# Altium PCB MB1183_B.PcbDoc
Units mil, origin at the board's own origin, x right, y up, seen from the top; angles counter-clockwise.
Board outline 885.83 x 1574.8 mil, 2 copper layers (Top Layer, Bottom Layer), stack 61.855 mil thick; 23 components, 26 nets, 127 pads, 65 vias.
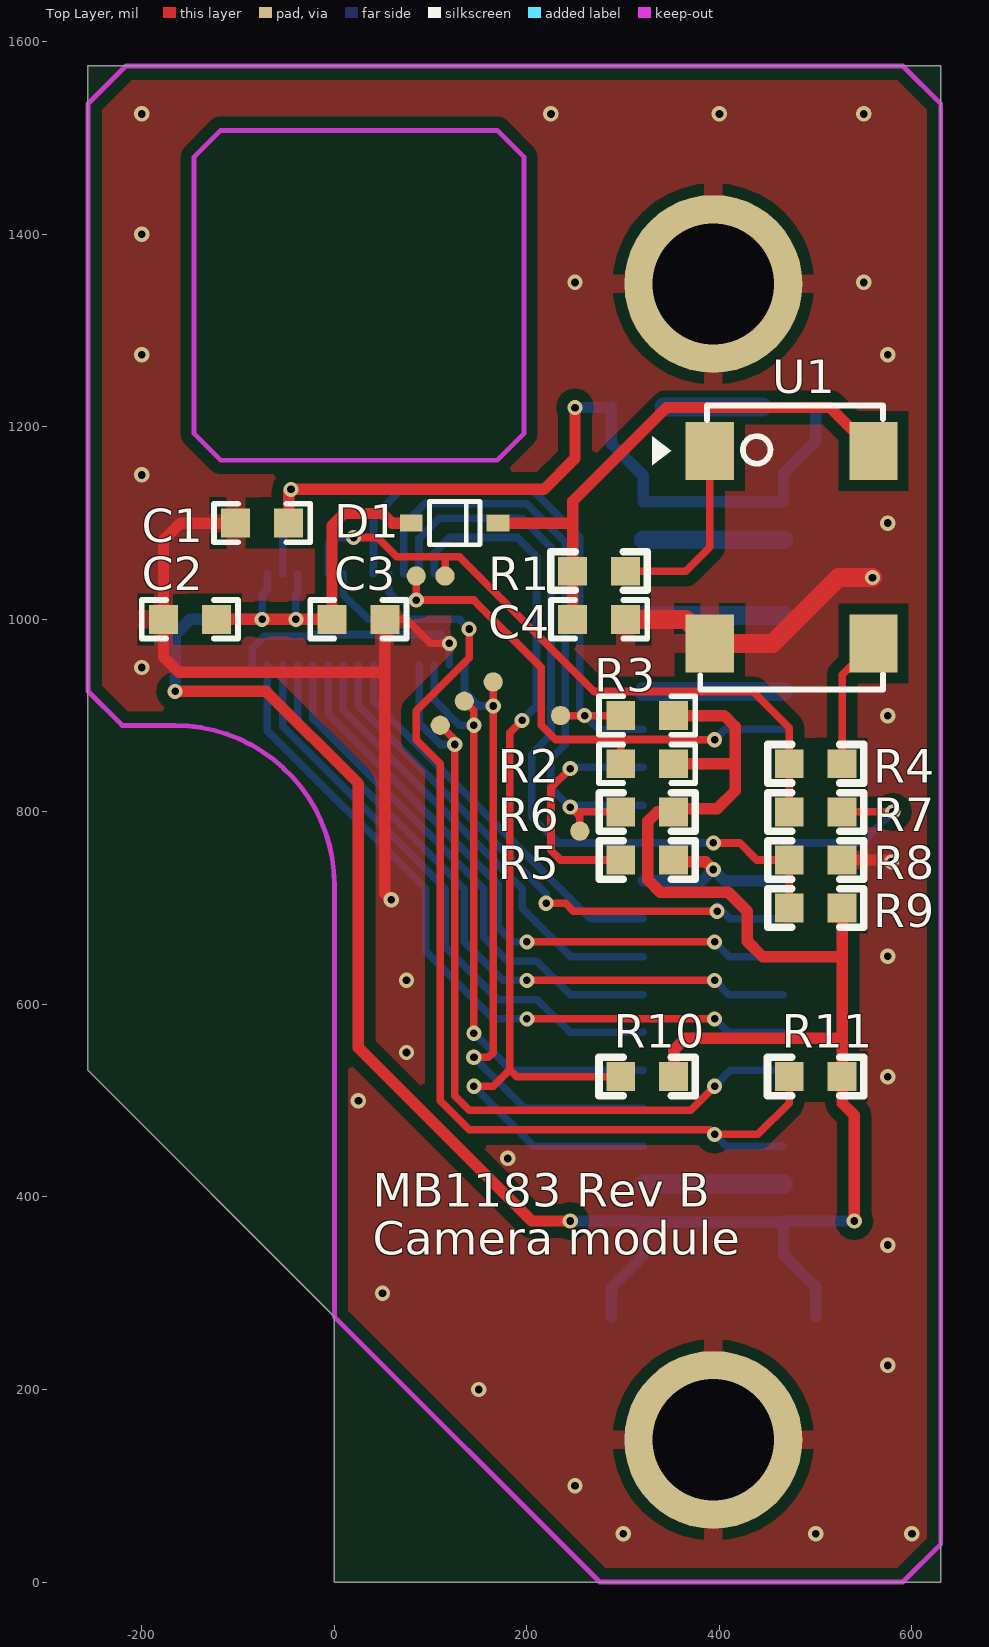
[diagram p0: Top Layer view]
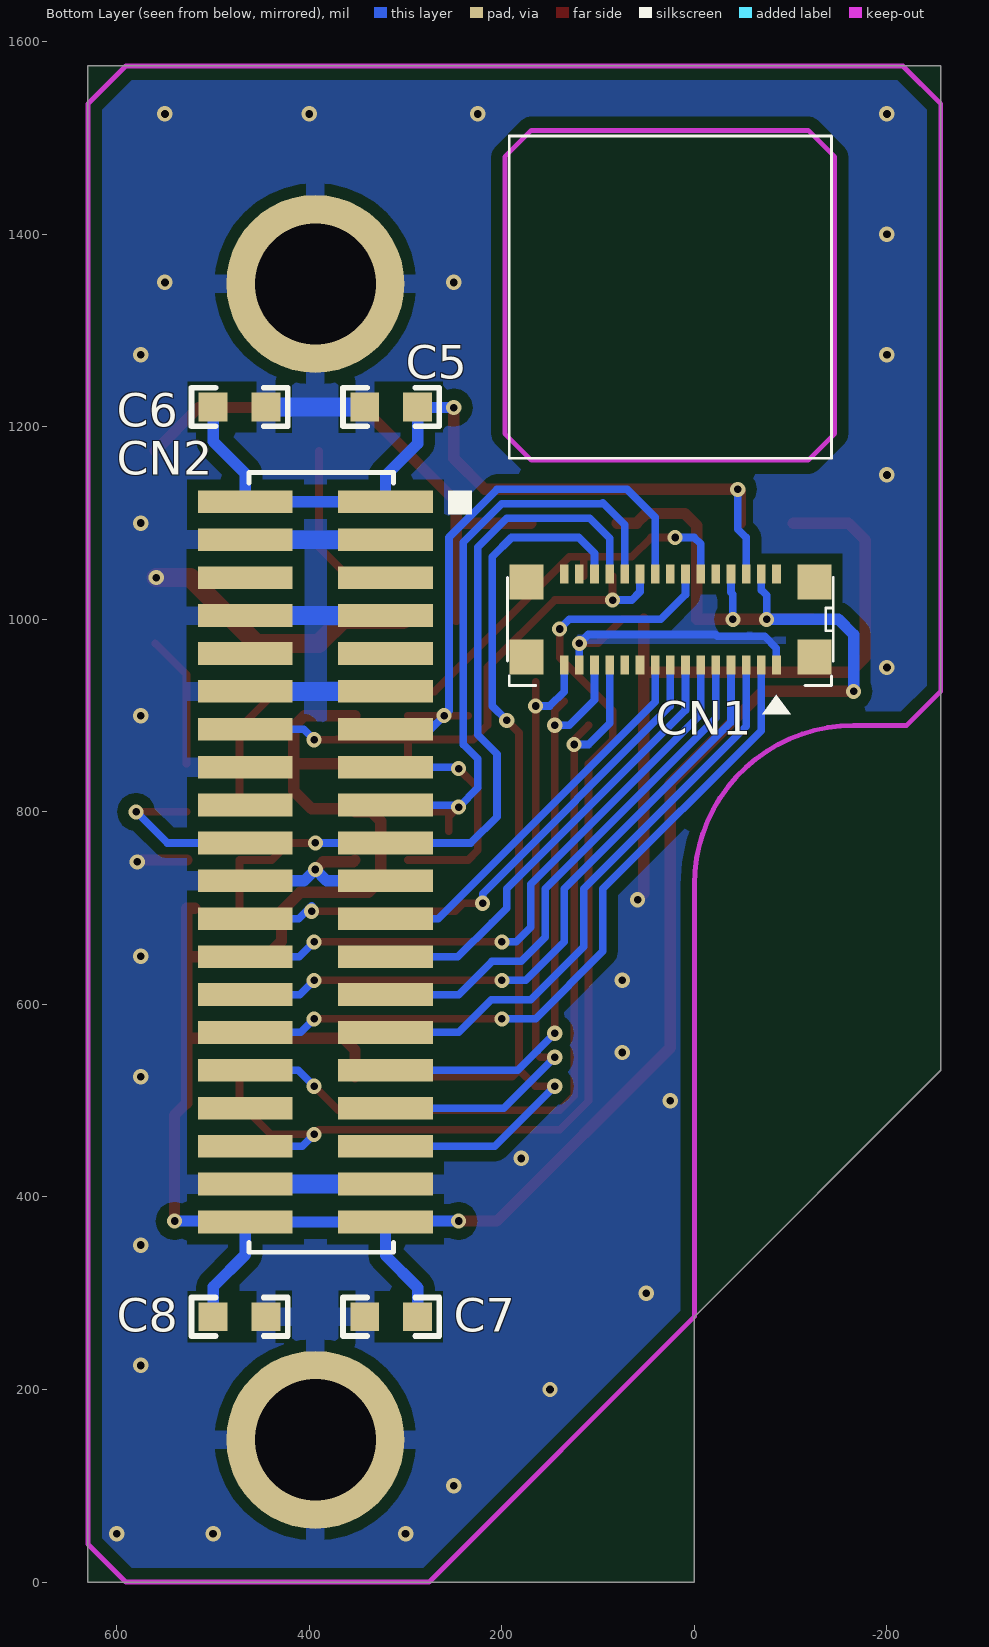
[diagram p1: Bottom Layer view, seen from below]

## Layer stack, top to bottom
Top Layer: signal copper 1.4
Dielectric: core 59.0551, FR-4, Dk 4.8
Bottom Layer: signal copper 1.4

## Board outline
0,0 629.92,0 629.92,1574.8 -255.91,1574.8 -255.91,531.5 0,275.59 0,0

## Design rules (kind name [scope] priority, off if disabled: settings)
Clearance Clearance_1 [(InPoly)] p1: gap=11.81
Clearance [All] p2: gap=5.91
FabricationTestPointUsage TestPointUsage [All] p1: valid=0 allowmultiple=FALSE
FabricationTestpoint Testpoint [(IsPad And (OnTopLayer Or OnBottomLayer))] p1: side=3 testpointundercomponent=TRUE minsize=40 maxsize=100 preferedsize=60 minholesize=0 maxholesize=40 preferedholesize=32 testpointgrid=1 allowsidetop=TRUE allowsidebottom=TRUE usegrid=TRUE gridtolerance=0.01
HoleSize [All] p1: absolutevalues=TRUE maxlimit=150 minlimit=1 maxpercent=80.000 minpercent=20.000
PlaneClearance [All] p1: clearance=19.68
PolygonConnect PolygonConnect_2 [(InComponent('CN1'))] p1: connectstyle=NoConnect reliefconductorwidth=10 reliefentries=2 polygonreliefangle="90 Angle"
PolygonConnect PolygonConnect_1 [IsVia] p2: connectstyle=Direct reliefconductorwidth=20 reliefentries=4 polygonreliefangle="90 Angle"
PolygonConnect [All] p3: connectstyle=Relief reliefconductorwidth=19.68 reliefentries=4 polygonreliefangle="90 Angle"
RoutingLayers [All] p1: top layer_v5=FALSE bottom layer_v5=FALSE
RoutingVias [All] p1: holewidth=11.81 width=23.62 viastyle="Through Hole" minholewidth=7.87 minwidth=15.75 maxholewidth=27.56 maxwidth=51.18
SilkscreenOverComponentPads [All] p1: minsilkscreentomaskgap=10
SolderMaskExpansion [All] p1: expansion=4
Width [All] p1: maxlimit=98.43 minlimit=5.91 preferedwidth=7.87 minimp=50.000000 maximp=50.000000 favimp=50.000000
22 further rules are at their usual default settings.

## Classes and differential pairs
net class PAR_D[0..7]: PAR_D0 PAR_D1 PAR_D2 PAR_D3 PAR_D4 PAR_D5 PAR_D6 PAR_D7

## Components (designator, comment, footprint, x,y, rotation, side; value= is the part's Value field where it differs from the comment)
C1 "100nF" 0603C -75,1100 r0 top (schematic designator C4)
C2 "100nF" 0603C -150,1000 r0 top (schematic designator C3)
C3 "100nF" 0603C 25,1000 r180 top (schematic designator C5)
C4 "100nF" 0603C 275,1000 r180 top (schematic designator C8)
C5 "100nF" 0603C 314.96,1220.47 r0 bottom (schematic designator C1)
C6 "100nF" 0603C 472.44,1220.47 r0 bottom (schematic designator C2)
C7 "100nF" 0603C 472.44,275.59 r0 bottom
C8 "100nF" 0603C 314.96,275.59 r180 bottom (schematic designator C6)
CN1 "AXE530124" AXE530124 25,1000 r0 bottom (schematic designator CN2)
CN2 "FTMH-120-03-L-DV-ES" FTMH-120-03-L-DV-ES 393.7,748.03 r270 bottom locked (schematic designator CN1)
D1 "BAT60JFILM" SOD-323 125,1100 r180 top
R1 "10K" 0603R 275,1050 r180 top (schematic designator R7)
R2 "[N/A]" 0603R 325,850 r0 top (schematic designator R8)
R3 "[N/A]" 0603R 325,900 r0 top (schematic designator R9)
R4 "0" 0603R 500,850 r0 top (schematic designator R6)
R5 "0" 0603R 325,750 r180 top (schematic designator R3)
R6 "10K" 0603R 325,800 r0 top (schematic designator R2)
R7 "[N/A]" 0603R 500,800 r0 top (schematic designator R5)
R8 "[N/A]" 0603R 500,750 r0 top (schematic designator R4)
R9 "22K" 0603R 500,700 r0 top (schematic designator R1)
R10 "[N/A]" 0603R 325,525 r0 top
R11 "[N/A]" 0603R 500,525 r0 top
U1 "SM7745HEW-24.0M" XTAL_5X7 475,1075 r270 top

## Footprints (in the part's own frame and the unit in brackets; to place one, negate y for a bottom-side part, rotate by r counter-clockwise, add the part's x,y. Pads: shape width x height; smd on the part's side, far side on the other; paste and mask are expansions set on the pad)
0603C [mil]
  rect 30x30 smd: 1(27.5,0) 2(-27.5,0)
  silkscreen extent -50,-20 50,20
0603R [mil]
  rect 30x30 smd: 1(27.5,0) 2(-27.5,0)
  silkscreen extent -50,-20 50,20
AXE530124 [mm]
  rect 0.9x0.92 smd: 0(-3.8,-0.99) 0(-3.8,0.99) 0(3.8,-0.99) 0(3.8,0.99)
  rect 0.23x0.5 smd: 1(-2.8,1.2) 2(-2.8,-1.2) 3(-2.4,1.2) 4(-2.4,-1.2) 5(-2,1.2) 6(-2,-1.2) 7(-1.6,1.2) 8(-1.6,-1.2) 9(-1.2,1.2) 10(-1.2,-1.2) 11(-0.8,1.2) 12(-0.8,-1.2) 13(-0.4,1.2) 14(-0.4,-1.2) 15(0,1.2) 16(0,-1.2) 17(0.4,1.2) 18(0.4,-1.2) 19(0.8,1.2) 20(0.8,-1.2) 21(1.2,1.2) 22(1.2,-1.2) 23(1.6,1.2) 24(1.6,-1.2) 25(2,1.2) 26(2,-1.2) 27(2.4,1.2) 28(2.4,-1.2) 29(2.8,1.2) 30(2.8,-1.2)
  silkscreen extent -4.3,-12.75 4.3,2.5
FTMH-120-03-L-DV-ES [mm]
  rect 0.6x2.5 smd: 1(-9.5,1.85) 2(-9.5,-1.85) 3(-8.5,1.85) 4(-8.5,-1.85) 5(-7.5,1.85) 6(-7.5,-1.85) 7(-6.5,1.85) 8(-6.5,-1.85) 9(-5.5,1.85) 10(-5.5,-1.85) 11(-4.5,1.85) 12(-4.5,-1.85) 13(-3.5,1.85) 14(-3.5,-1.85) 15(-2.5,1.85) 16(-2.5,-1.85) 17(-1.5,1.85) 18(-1.5,-1.85) 19(-0.5,1.85) 20(-0.5,-1.85) 21(0.5,1.85) 22(0.5,-1.85) 23(1.5,1.85) 24(1.5,-1.85) 25(2.5,1.85) 26(2.5,-1.85) 27(3.5,1.85) 28(3.5,-1.85) 29(4.5,1.85) 30(4.5,-1.85) 31(5.5,1.85) 32(5.5,-1.85) 33(6.5,1.85) 34(6.5,-1.85) 35(7.5,1.85) 36(7.5,-1.85) 37(8.5,1.85) 38(8.5,-1.85) 39(9.5,1.85) 40(9.5,-1.85)
  silkscreen extent -10.28,-1.75 10.3,4.14
SOD-323 [mm]
  rect 0.6x0.45 smd: 1(1.143,0) 2(-1.143,0)
  silkscreen extent -0.67,-0.57 0.67,0.57
XTAL_5X7 [mil]
  rect 60x50 smd: 1(-100,-85) 2(100,-85) 3(100,85) 4(-100,85)
  silkscreen extent -147,-145 148,95

## Part data
C1 C2 C3 C4 C5 C6 C7 C8: library part Cap, "Capacitor"
CN1: library part U866_3M_FF, "CAMERA MODULE"
CN2: library part "Header 20X2", "20*2Pins, 1mm_SMT, male"
D1: library part Diode, "Default Diode"
R1 R3 R4 R5 R6 R7 R8 R9 R10 R11: library part Res1, "Resistor"
R2: library part Res1, "Resistor 10K"
U1: library part SM7745HEV-50.0M

## Free pads (board coordinates)
  round 20 smd: 0(85,1045) 0(110,890) 0(115,1045) 0(135,915) 0(165,935) 0(235,900) 0(255,780)
  round 185.04 hole 125.98: 0(393.7,147.64) 0(393.7,1348.43)

## Via types
v1: diameter 15.75, hole 7.87, Top Layer to Bottom Layer, tented both sides, 37 vias
v2: diameter 16, hole 8, Top Layer to Bottom Layer, tented both sides, 28 vias

## Nets (pads, with @x,y where several pads share a name; then routed paths per layer and width w, separated by ;. In a path a pad name is that pad's centre, name@x,y a point inside that pad or via, vN(x,y) a via of type N, cw(c..) or ccw(c..) an arc to the next point about the centre after c; other vN are vias at no path point)
+1V8: C1.1 C5.2 C6.1 CN1.6 CN2.1 CN2.2 | length 897.2
  Top Layer w11.81: C1.1 -47.5,1132.5 v1(-45,1135) 217.68,1135 250,1167.32 v1(250,1220)
  Bottom Layer w7.87: CN1.6@-53.15,1047.83 CN1.6 -53.74,1085 -45,1093.74 v1(-45,1135)
  Bottom Layer w11.81: v1(250,1220) 286.99,1220 C5.2 287.46,1182.54 320.87,1149.13 CN2.1 CN2.2 466.53,1151.53 499.94,1184.94 C6.1
+2V8: C2.1 C3.1 C7.1 C8.1 CN1.4 CN1.8 CN2.39 CN2.40 D1.1 R2.1 R3.1 R6.1 R9.1 R10.1 R11.1 | length 3051.6
  Top Layer w11.81: v1(-165.35,925.2) -70.87,925.2 25,829.33 25,555 205,375 v1(245,375) ; C2.1 v1(-75,1000) ; v1@-80,1000 v1(-75,1000) ; D1.1 60,1100 50,1110 10,1110 -2.5,1097.5 -2.5,1000 v1(-40,1000) v1(-75,1000) ; R10.1 352.5,552.5 365,565 527.5,565 ; R2.1 412.74,850 416.28,846.46 ; R3.1 405,900 416.28,888.72 416.28,846.46 ; R9.1@519.2,700 R9.1 527.5,649.61 ; v1(540,375) 540,485 527.5,497.5 R11.1 527.5,565 ; 416.28,846.46 416.28,821.79 397.64,803.15 355.65,803.15 R6.1 335.43,800 325.69,790.26 325.69,729.43 338.58,716.54 409.26,716.54 428.95,696.85 428.95,665.54 444.88,649.61 527.5,649.61 ; 527.5,565 527.5,649.61
  Bottom Layer w7.87: v1(-75,1000) -75,1025 -69.49,1030.51 CN1.4 ; v1(-40,1000) -40,1026.04 -37.99,1028.05 CN1.8
  Bottom Layer w11.81: v1(-165.35,925.2) -165.35,984.25 -149.61,1000 v1(-75,1000) ; v1(245,375) 319.89,375 CN2.39 ; C8.1 287.46,305.71 320.87,339.13 CN2.39 ; C7.1 499.94,306.59 466.53,340 CN2.40 ; v1(540,375) 467.51,375 CN2.40 ; CN2.39 CN2.40
CAMERA_CLK: CN1.12 pad.0@115,1045 R4.2 R7.2 | length 702.3
  Top Layer w7.87: v1(20,1085) 45.05,1085 65.03,1065.03 115,1065.03 ; pad.0@115,1045 115,1065.03 ; R7.2 R4.2 472.5,887.5 435,925 270,925 129.97,1065.03 115,1065.03
  Bottom Layer w7.87: CN1.12 -6.5,1078.45 0.05,1085 v1(20,1085)
CAMERA_RST: CN1.22 CN2.17 pad.0@255,780 R6.2 | length 688.3
  Top Layer w7.87: v1(245,805) v1@250,800 ; pad.0@255,780 255,795 v1@250,800 ; R6.2 v1@250,800
  Bottom Layer w7.87: CN1.22 72.24,1098.4 95,1121.16 96.16,1120 200,1120 240,1080 240,870 225,855 225,825 v1(245,805) 247.09,807.09 CN2.17
EXTCLK: CN2.20 R7.1 | length 179.3
  Top Layer w8: R7.1 v1(580,800)
  Bottom Layer w8: CN2.20 547.72,767.72 v1(580,800)
FLASH: CN1.14 CN2.36 R11.2 | length 1184.7
  Top Layer w7.87: v1(140,990) 140,960 85,905 85,875 110,850 110,500 140,470 390,470 v1(395,465) 440,465 472.5,497.5 R11.2
  Bottom Layer w7.87: CN1.14 9.25,1025.75 35,1000 130,1000 v1(140,990) ; v1(395,465) 407.24,452.76 CN2.36
GND: C1.2 C2.2 C3.2 C4.2 C5.1 C6.2 C7.2 C8.2 CN1.1 CN1.27 CN2.3 CN2.4 CN2.7 CN2.8 CN2.11 CN2.12 CN2.16 CN2.21 CN2.22 CN2.37 CN2.38 pad.0@393.7,147.64 pad.0@393.7,1348.43 R5.2 R8.1 U1.2 | length 2298.7
  Top Layer w7.87: C3.2@52.5,1000 74.8,1000 99.8,975 v1(119.49,975)
  Top Layer w11.81: C1.2 -159.84,1100 -177.5,1082.34 C2.2 -177.5,960.96 -161.42,944.88 52.5,944.88 ; C3.2@52.5,1000 52.5,944.88 ; v1(59.06,708.66) 52.5,715.22 52.5,944.88 ; R5.2 354.47,748.03 385.83,748.03 v1(393.7,740.16) ; R8.1 576.77,750 v1(578.74,748.03)
  Top Layer w19.68: C4.2 365,1000 U1.2 455.32,975 523.62,1043.31 v1(559.06,1043.31)
  Bottom Layer w7.87: CN1.1 -85.24,969.88 -72.83,982.28 -23.62,982.28 -21.65,984.25 110.24,984.25 v1(119.49,975) CN1.27
  Bottom Layer w11.81: CN2.21 381.89,728.35 v1(393.7,740.16) 405.51,728.35 CN2.22
  Bottom Layer w19.68: CN2.37 CN2.38 ; CN2.11 CN2.12 ; CN2.7 CN2.8 ; CN2.3 CN2.4 ; C5.1 C6.2
  other v2: 300,50 500,50 600,50 250,100 150,200 575,225 50,300 575,350 180,440 25,500 575,525 75,550 75,625 575,650 575,900 -200,950 575,1100 -200,1150 -200,1275 575,1275 250,1350 550,1350 -200,1400 -200,1525 225,1525 400,1525 550,1525
NetC4_1: C4.1 D1.2 R1.1 U1.4 | length 621.5
  Top Layer w11.81: D1.2 247.5,1100 R1.1 ; C4.1 247.5,1122.5 345,1220 515,1220 U1.4
NetCN2_15: CN2.15 R5.1 | length 246.4
  Top Layer w8: v1(245,845) 225,825 225,760 235,750 R5.1
  Bottom Layer w8: v1(245,845) 246.46,846.46 CN2.15
NetR1_2: R1.2 U1.1 | length 230.4
  Top Layer w8: R1.2 365,1050 390,1075 390,1142.5 ; 390,1110 390,1142.5 ; U1.1 390,1142.5
NetR4_1: R4.1 U1.3 | length 138.5
  Top Layer w8: R4.1 527.5,942.5 U1.3
PAR_D0: CN1.17 CN2.23 | length 411.9
  Bottom Layer w7.87: CN1.17 40.75,914.25 266.02,688.98 CN2.23
PAR_D1: CN1.15 CN2.24 | length 589.5
  Top Layer w7.87: v1(220,705) 240.16,705 248.31,696.85 v1(397.64,696.85)
  Bottom Layer w7.87: CN1.15 25,910 220,715 v1(220,705) ; v1(397.64,696.85) 397.64,702.36 411.02,688.98 CN2.24
PAR_D2: CN1.13 CN2.25 | length 476.4
  Bottom Layer w7.87: CN1.13 9.25,905.75 195,720 195,700 210,685 210.24,685 245.63,649.61 CN2.25
PAR_D3: CN1.11 CN2.26 | length 655
  Top Layer w7.87: v1(200,665) v1(395,665)
  Bottom Layer w7.87: CN1.11 -6.5,901.5 170,725 170,680 185,665 v1(200,665) ; v1(395,665) 410.39,649.61 CN2.26
PAR_D4: CN1.9 CN2.27 | length 546.8
  Bottom Layer w7.87: CN1.9 -22.24,897.24 155,720 155,670 180,645 210.24,645 245,610.24 CN2.27
PAR_D5: CN1.7 CN2.28 | length 713.6
  Top Layer w7.87: v1(200,625) v1(395,625)
  Bottom Layer w7.87: CN1.7 -37.99,892.99 135,720 135,665 175,625 v1(200,625) ; v1(395,625) 409.76,610.24 CN2.28
PAR_D6: CN1.5 CN2.29 | length 605.4
  Bottom Layer w7.87: CN1.5 -53.74,888.74 115,720 115,660 170,605 210.87,605 245,570.87 CN2.29
PAR_D7: CN1.3 CN2.30 | length 772.3
  Top Layer w7.87: v1(200,585) v1(395,585)
  Bottom Layer w7.87: CN1.3 -69.49,884.49 95,720 95,655 165,585 v1(200,585) ; v1(395,585) 409.13,570.87 CN2.30
PAR_HSYNC: CN1.25 CN2.31 pad.0@135,915 | length 629.7
  Top Layer w7.87: pad.0@135,915 145,905 v1(145,890) v1(145,570)
  Bottom Layer w7.87: CN1.25 103.74,916.26 130,890 v1(145,890) ; v1(145,570) 145.23,570 162.84,552.39 162.84,552.16 183.5,531.5 CN2.31
PAR_PCLK: CN1.29 CN2.33 pad.0@165,935 | length 668.6
  Top Layer w7.87: v2(145,545) 160,545 165,550 v1(165,910) pad.0@165,935
  Bottom Layer w7.87: CN1.29 135.24,925 150.24,910 v1(165,910) ; v2(145,545) 197.87,492.13 CN2.33
PAR_VSYNC: CN1.23 CN2.32 pad.0@110,890 | length 863
  Top Layer w7.87: pad.0@110,890 125,875 v1(125,870) 125,505 140,490 370,490 v1(395,515)
  Bottom Layer w7.87: CN1.23 87.99,892.01 110,870 v1(125,870) ; v1(395,515) 411.5,531.5 CN2.32
SCL: CN1.18 CN2.13 pad.0@235,900 R3.2 | length 626.9
  Top Layer w8: pad.0@235,900 v1@255,900 ; v1(260,900) v1@255,900 ; R3.2 v1@255,900
  Bottom Layer w8: CN1.18 40.75,1105.75 70,1135 205,1135 255,1085 255,905 v1(260,900) 274.17,885.83 CN2.13
SDA: CN1.20 CN2.14 pad.0@85,1045 R2.2 | length 583.2
  Top Layer w8: pad.0@85,1045 v1(85,1020) 145,1020 215,950 215,890 229.9,875.1 295.1,875.1 ; R2.2 297.5,872.5 295,875 295.1,875.1 ; v1(395,875) 371.7,875 371.6,875.1 295.1,875.1
  Bottom Layer w8: CN1.20 56.5,1028.5 65,1020 v1(85,1020) ; v1(395,875) 405.83,885.83 CN2.14
SHUTTER: CN1.26 CN2.35 R10.2 | length 1051.3
  Top Layer w8: v1(145,515) 165,515 182.22,532.22 ; v1(195,895) 182.22,882.22 182.22,532.22 ; R10.2 189.44,525 182.22,532.22
  Bottom Layer w8: CN1.26 103.74,1068.74 120,1085 190,1085 210,1065 210,910 v1(195,895) ; v1(145,515) 207.24,452.76 CN2.35
STANDBY: CN1.24 CN2.19 R8.2 R9.2 | length 819.4
  Top Layer w8: v1(393.7,767.72) 421.26,767.72 438.98,750 R8.2 R9.2
  Bottom Layer w8: CN1.24 87.99,1084.15 108.84,1105 195,1105 225,1075 225,880 205,860 205,795 232.28,767.72 CN2.19 338.58,767.72 v1(393.7,767.72)
pads on no net: CN1.0 CN1.2 CN1.10 CN1.16 CN1.19 CN1.21 CN1.28 CN1.30 CN2.5 CN2.6 CN2.9 CN2.10 CN2.18 CN2.34

## Polygon pours and split planes (outlines as drawn)
GND on Bottom Layer "Top Layer-No Net 1" (solid, remove dead copper, pour order 8): -314.96,1614.17 -314.96,62.27 -188.98,-70.87 -177.17,-58.38 696.85,-58.38 696.85,1593.37 712.6,1610.01
GND on Top Layer "Top Layer-No Net 1" (solid, remove dead copper, pour order 3): -232.28,1606.3 -204.72,1578.74 669.29,1578.74 669.29,-39.37 700.79,-70.87 649.61,-19.68 -279.53,-19.68 -279.53,787.4 -342.52,850.39 -311.02,881.89 -311.02,1602.36 -236.22,1602.36

## Keep-outs
Keep-Out Layer:
  lines w5: -255.91,925.2 -220.47,889.76 -165.35,889.76 cw(c-165.35,724.41) 0,724.41 0,275.59 275.59,0 590.55,0 629.92,39.37 629.92,1535.43 590.55,1574.8 39.37,1574.8 -216.53,1574.8 -255.91,1535.43 -255.91,925.2 ; -145.67,1192.91 -145.67,1480.32 -118.11,1507.87 169.29,1507.87 196.85,1480.32 196.85,1192.91 169.29,1165.35 -118.11,1165.35 -145.67,1192.91

## Silkscreen, mask and mechanical layers (free items; w line width, h text height)
Top Overlay:
  text "MB1183 Rev B" at 40,390 h35
  text "Camera module" at 40,340 h35
Mechanical 1:
  lines w5: 0,354.33 0,275.59 ; 0,275.59 0,724.41 ccw(c-165.35,724.41) -165.35,889.76 -220.47,889.76 -255.91,925.2 -255.91,1535.43 -216.54,1574.8 39.37,1574.8 590.55,1574.8 629.92,1535.43 629.92,39.37 590.55,0 275.59,0 0,275.59 ; -145.67,1192.91 -118.11,1165.35 169.29,1165.35 196.85,1192.91 196.85,1480.32 169.29,1507.87 -118.11,1507.87 -145.67,1480.32 -145.67,1192.91
  text "MB1183" at -225,1600 h60
Drill Drawing:
  lines w2: 1024.57,368.45 2105.35,368.45 ; 1024.57,407.35 2105.35,407.35 ; 964.57,131.11 ccw(c977.57,131.11) 977.57,118.11 2152.35,118.11 ccw(c2152.35,131.11) 2165.35,131.11 2165.35,479.13 ccw(c2152.35,479.13) 2152.35,492.13 977.57,492.13 ccw(c977.57,479.13) 964.57,479.13 964.57,131.11
  text ".legend" at 767.72,1535.43 h35
  text "Layer Stack Up Detail for: MB1183.PcbDoc" at 1024.57,429.94 h26
  text "Layer" at 1024.57,392.85 h9
  text "Gerber" at 1260.63,392.85 h9
  text "Copper" at 1369.73,392.85 h9
  text "Dielectric" at 1493.52,392.85 h9
  text "Dielectric" at 1623.62,392.85 h9
  text "Dielectric" at 1794.7,392.85 h9
  text "Dielectric" at 1924.8,392.85 h9
  text "Name" at 1024.57,374.85 h9
  text "Document" at 1260.63,374.85 h9
  text "Thickness" at 1369.73,374.85 h9
  text "Height" at 1493.52,374.85 h9
  text "Material" at 1623.62,374.85 h9
  text "Constant" at 1794.7,374.85 h9
  text "Type" at 1924.8,374.85 h9
  text "Top Solder Mask" at 1024.57,344.08 h13
  text "(.GTS)" at 1260.63,344.08 h13
  text "0.4mil" at 1493.52,344.08 h13
  text "Solder Resist" at 1623.62,344.08 h13
  text "3.50" at 1794.7,344.08 h13
  text "Top Layer" at 1024.57,297.33 h13
  text "(.GTL)" at 1260.63,297.33 h13
  text "1.4mil" at 1369.73,297.33 h13
  text "59.055mil" at 1493.52,273.95 h13
  text "FR-4" at 1623.62,273.95 h13
  text "4.80" at 1794.7,273.95 h13
  text "Core" at 1924.8,273.95 h13
  text "Bottom Layer" at 1024.57,250.57 h13
  text "(.GBL)" at 1260.63,250.57 h13
  text "1.4mil" at 1369.73,250.57 h13
  text "Bottom Solder Mask" at 1024.57,203.82 h13
  text "(.GBS)" at 1260.63,203.82 h13
  text "0.4mil" at 1493.52,203.82 h13
  text "Solder Resist" at 1623.62,203.82 h13
  text "3.50" at 1794.7,203.82 h13